# EAGLE board Low Voltage Power Supply (EAGLE 6.2)
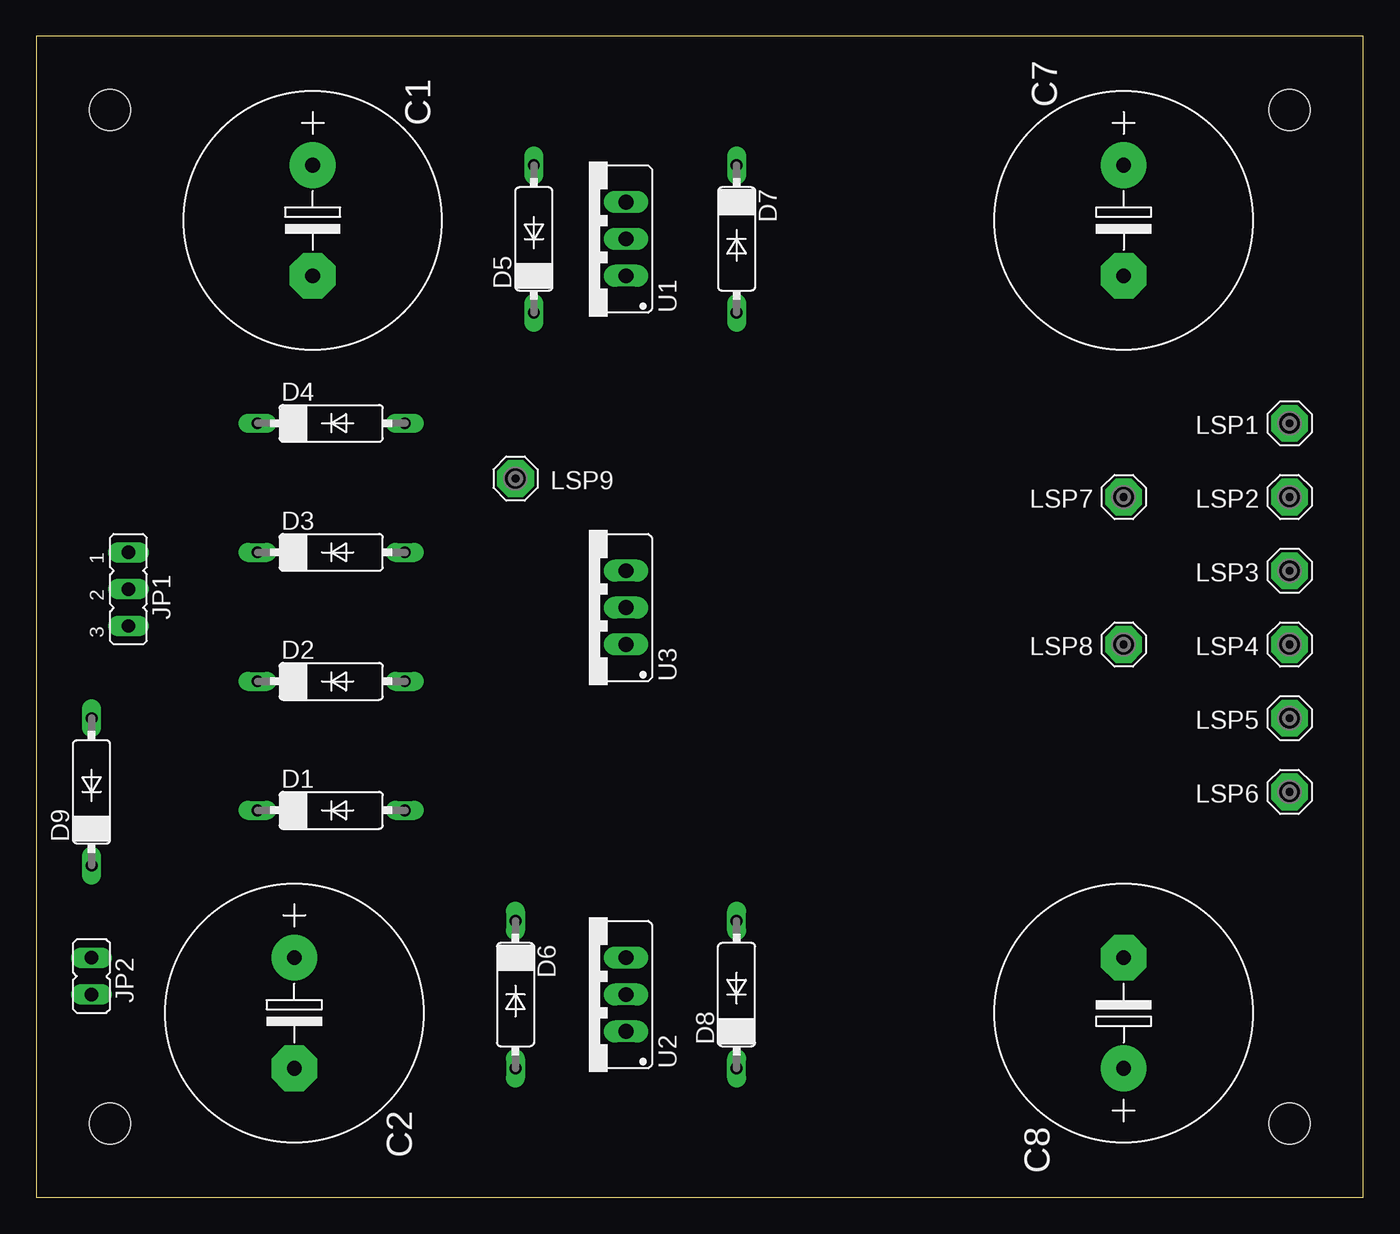
[diagram p0: board, top side]
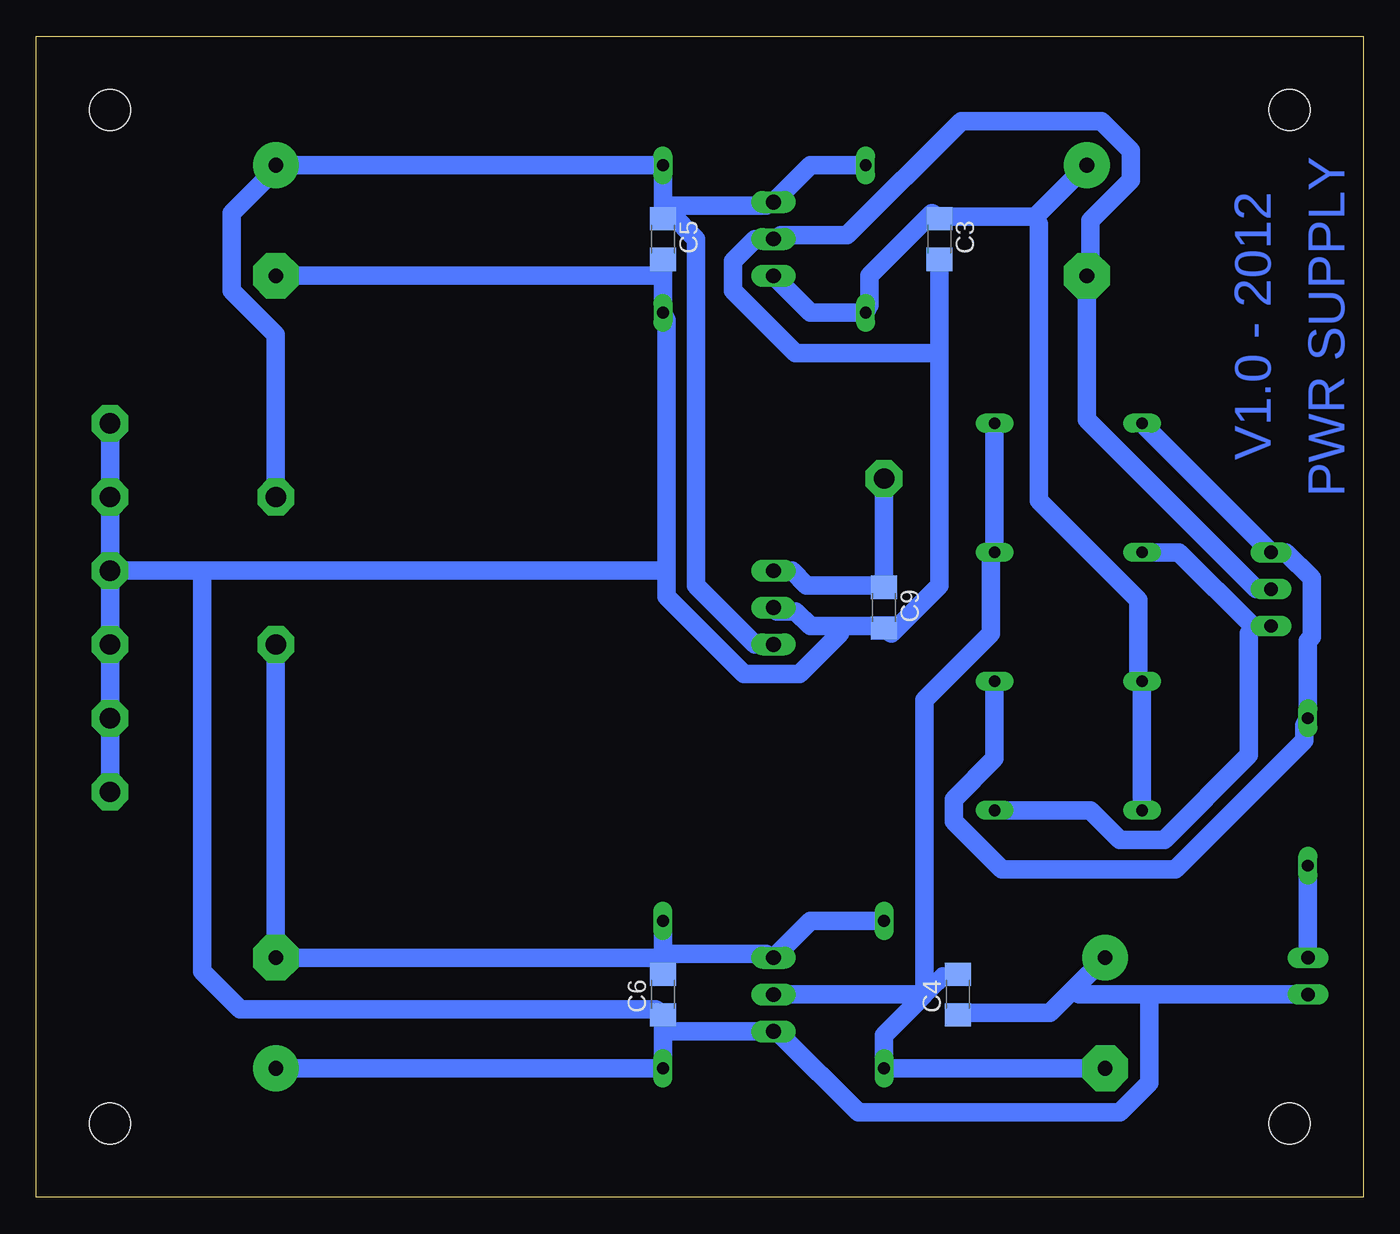
[diagram p1: board, bottom side, seen from below]

Size 91.44 x 80.01 mm. Coordinates in mm from the lower left corner, seen from the top.
Outline: 0,0 91.44,0 91.44,80.01 0,80.01 0,0
Copper layers (1*16): Top 0.035mm / dielectric 1.5mm / Bottom 0.035mm
Design rules: minimum track width 50mil, minimum drill 10mil, track to track 25mil, track to pad 25mil, pad to pad 25mil, via to via 25mil, smd to smd 10mil, copper to edge 40mil, drill to drill 8mil, minimum pad ring 10mil, minimum via ring 8mil, stop-mask expansion 4mil, vias tented up to drill 0mil, thermal gap 10mil
Holes 2.8 mm at 5.08,74.93 5.08,5.08 86.36,5.08 86.36,74.93

## Footprints (pad centres in the part's own frame; a part is rotated, then mirrored left to right if it is on the bottom)
E7,5-18 = drill 1.016 pad 3.15: + -3.81,0 | drill 1.016 pad 3.15 octagon: - 3.81,0
C1206 = smd 1.6 x 1.8: 1 -1.4,0; 2 1.4,0
DIODE.4-AXIAL = drill 0.813 long: A 5.08,0; C -5.08,0
JP2 = drill 0.914 long: 1 -2.54,0; 2 0,0; 3 2.54,0
JP1 = drill 0.914 long: 1 0,-1.27; 2 0,1.27
SE14 = drill 1.397 pad 2.54 octagon: MP 0,0
78XXS = drill 1.016 long: GND 0,-2.54; IN -2.54,-2.54; OUT 2.54,-2.54
79XXS = drill 1.016 long: GND -2.54,-2.54; IN 0,-2.54; OUT 2.54,-2.54

## Placement (x,y rotation side)
C1  2200uF 35V  [E7,5-18]  19.05,67.31 270 top
C2  2200uF 35V  [E7,5-18]  17.78,12.7 270 top
C3  .33uF 35V Tant  [C1206]  29.21,66.04 270 bottom
C4  2.2uF 25V Tant  [C1206]  27.94,13.97 90 bottom
C5  0.1uF 35V Tant  [C1206]  48.26,66.04 270 bottom
C6  1uF 35V Tant  [C1206]  48.26,13.97 90 bottom
C7  4700uF 35V  [E7,5-18]  74.93,67.31 270 top
C8  4700uF 35V  [E7,5-18]  74.93,12.7 90 top
C9  1uF 35V Tant  [C1206]  33.02,40.64 270 bottom
D1  1N4001  [DIODE.4-AXIAL]  20.32,26.67 0 top
D2  1N4001  [DIODE.4-AXIAL]  20.32,35.56 0 top
D3  1N4001  [DIODE.4-AXIAL]  20.32,44.45 0 top
D4  1N4001  [DIODE.4-AXIAL]  20.32,53.34 0 top
D5  1N4001  [DIODE.4-AXIAL]  34.29,66.04 90 top
D6  1N4001  [DIODE.4-AXIAL]  33.02,13.97 270 top
D7  1N4001  [DIODE.4-AXIAL]  48.26,66.04 270 top
D8  1N4001  [DIODE.4-AXIAL]  48.26,13.97 90 top
D9  1N4001  [DIODE.4-AXIAL]  3.81,27.94 90 top
JP1  AC IN  [JP2]  6.35,41.91 270 top
JP2  Zero-X  [JP1]  3.81,15.24 180 top
LSP1  SE14  [SE14]  86.36,53.34 0 top
LSP2  SE14  [SE14]  86.36,48.26 0 top
LSP3  SE14  [SE14]  86.36,43.18 0 top
LSP4  SE14  [SE14]  86.36,38.1 0 top
LSP5  SE14  [SE14]  86.36,33.02 0 top
LSP6  SE14  [SE14]  86.36,27.94 0 top
LSP7  SE14  [SE14]  74.93,48.26 0 top
LSP8  SE14  [SE14]  74.93,38.1 0 top
LSP9  SE14  [SE14]  33.02,49.53 0 top
U1  7815  [78XXS]  38.1,66.04 90 top
U2  7915  [79XXS]  38.1,13.97 90 top
U3  7805  [78XXS]  38.1,40.64 90 top

## Library data of the parts
C1-C9 = resistor
D1-D9 = 1-Custom
JP1 JP2 = jumper
LSP1-LSP9 = solpad
U1-U3 = v-reg

## Nets
+5V: C9.1 LSP9.MP U3.OUT
+15V: C5.1 C7.+ D5.A D7.C LSP7.MP U1.OUT U3.IN
-15V: C6.2 C8.- D6.C D8.A LSP8.MP U2.OUT
GND: C1.- C2.+ C3.2 C4.1 C5.2 C6.1 C7.- C8.+ C9.2 D7.A D8.C JP1.2 JP2.2 LSP1.MP LSP2.MP LSP3.MP LSP4.MP LSP5.MP LSP6.MP U1.GND U2.GND U3.GND
N$1: C1.+ C3.1 D1.C D2.C D5.C U1.IN
N$2: D2.A D4.C D9.A JP1.1
N$3: D1.A D3.C JP1.3
N$4: C2.- C4.2 D3.A D4.A D6.A U2.IN
N$9: D9.C JP2.1

## Tracks (layer width: path | path; a pad name or v marks a point on that pad's centre or on a via)
+5V
  Bottom 1.27: U3.OUT 39.37,43.18 38.35,42.16 33.02,42.16 C9.1 LSP9.MP
+15V
  Bottom 1.27: D5.A 38.1,71.12 U1.OUT 41.15,68.33 47.5,68.33 47.75,67.82 | U3.IN 41.91,38.1 45.97,42.16 45.97,66.04 47.75,67.82 | 47.75,67.82 C5.1 D7.C C7.+ 75.18,70.61 77.98,67.82 77.98,62.48 74.93,59.44 LSP7.MP
-15V
  Bottom 1.27: D8.A 48.26,16.76 | 48.26,16.76 48.26,16.51 | 48.26,16.51 C6.2 | D6.C 38.1,19.05 U2.OUT 41.15,16.76 48.26,16.76 | 48.26,16.51 C8.- LSP8.MP
GND
  Bottom 1.27: C2.+ 19.94,14.35 | 19.94,14.35 21.59,12.7 27.94,12.7 C4.1 | 14.73,13.97 19.56,13.97 19.94,14.35 | 14.73,13.97 JP2.2 | 48.26,11.43 D8.C C8.+ | 48.26,11.43 C6.1 48.77,12.95 77.39,12.95 80.01,15.57 80.01,43.18 | 48.26,11.43 U2.GND 40.13,11.18 34.8,5.84 16.76,5.84 14.73,7.87 14.73,13.97 | JP1.2 7.37,41.91 19.05,53.59 C1.- 18.8,64.01 18.8,67.31 16,70.1 16,72.14 18.03,74.17 27.69,74.17 35.56,66.29 40.13,66.29 U1.GND 41.91,66.04 43.43,64.52 43.43,62.48 39.12,58.17 29.21,58.17 | 48.26,63.5 D7.A 48.01,60.45 48.01,43.18 | 48.26,63.5 C5.2 | C7.- 48.26,63.5 | 36.07,39.37 38.1,39.37 39.12,40.39 40.39,40.39 U3.GND | 36.07,39.37 33.02,39.37 C9.2 32.51,38.86 29.21,42.16 29.21,58.17 | 29.21,58.17 C3.2 | 48.01,43.18 48.01,41.4 42.67,36.07 38.86,36.07 36.07,38.86 36.07,39.37 | LSP3.MP 80.01,43.18 | 80.01,43.18 48.01,43.18 | LSP1.MP LSP2.MP LSP3.MP | LSP3.MP LSP4.MP LSP5.MP LSP6.MP
N$1
  Bottom 1.27: U1.IN 38.1,60.96 D5.C 34.04,61.47 34.04,63.5 29.72,67.82 C3.1 29.21,67.56 22.61,67.56 | D1.C D2.C 15.49,36.07 15.49,41.15 22.35,48.01 22.35,67.06 22.61,67.56 | C1.+ 22.61,67.56
N$2
  Bottom 1.27: D4.C JP1.1 5.33,44.45 3.56,42.67 3.56,38.61 3.81,38.35 D9.A 4.06,32.51 4.06,31.5 12.95,22.61 24.89,22.61 28.19,25.91 28.19,27.43 25.4,30.23 D2.A
N$3
  Bottom 1.27: D3.C 12.7,44.45 7.62,39.37 | JP1.3 7.62,39.37 | D1.A 18.8,26.67 16.76,24.64 13.72,24.64 7.87,30.48 7.87,38.86 7.62,39.37
N$4
  Bottom 1.27: D4.A D3.A 25.65,43.94 25.65,38.86 30.23,34.29 30.23,14.73 29.84,14.35 | 30.61,13.59 33.02,11.18 D6.A C2.- | 30.61,13.59 29.84,14.35 | 29.84,14.35 28.96,15.24 27.94,15.24 C4.2 | U2.IN 30.99,13.97 30.61,13.59
N$9
  Bottom 1.27: JP2.1 D9.C

## Text on the board
Bottom: V1.0 - 2012 | PWR SUPPLY